# EAGLE board open-lab-VUSB-A (EAGLE 6.5.0)

Size 64.95 x 52.82 mm. Coordinates in mm from the lower left corner, seen from the top.
Outline: 0,0 64.95,0 64.95,52.82 0,52.82 0,0
Copper layers (1*16): Top 0.035mm / dielectric 1.5mm / Bottom 0.035mm
Design rules "default": minimum track width 10mil, minimum drill 24mil, track to track 8mil, track to pad 8mil, pad to pad 8mil, via to via 8mil, smd to smd 8mil, copper to edge 40mil, drill to drill 8mil, minimum pad ring 10mil, minimum via ring 8mil, stop-mask expansion 4mil, vias tented up to drill 0mil, thermal gap 10mil
Net classes: 0 default: width 0.203 mm, clearance 0.203 mm; 1 power: width 0.406 mm, clearance 0.203 mm

## Footprints (pad centres in the part's own frame; a part is rotated, then mirrored left to right if it is on the bottom)
C0805 = smd 1.3 x 1.5: 1 -0.85,0; 2 0.85,0
C0805' = smd 1.3 x 1.5: 1 -0.95,0; 2 0.95,0
CHIPLED_0805 = smd 1.2 x 1.2: A 0,-1.05; C 0,1.05
JST-PH-2-SMT-RA = smd 1 x 4.6: 1 1,-3.7; 2 -1,-3.7 | smd 1.6 x 3.4: NC1 -3.4,1.5; NC2 3.4,1.5
C0805K = smd 1.1 x 1.4: 1 -1,0; 2 1,0
_0805 = smd 1.2 x 1.3: 1 -1.016,0; 2 1.016,0
SOD-323F = smd 1 x 0.8: A -1,0; C 1,0
1X04_LOCK = drill 1.016 pad 1.88 square: 1 0,0.127 | drill 1.016 pad 1.88: 2 2.54,-0.127; 3 5.08,0.127; 4 7.62,-0.127
JP1 = drill 0.914 long: 1 0,-1.27; 2 0,1.27
TQFP32-08 = smd 1.27 x 0.559: 1 -4.293,2.8; 2 -4.293,2; 3 -4.293,1.2; 4 -4.293,0.4; 5 -4.293,-0.4; 6 -4.293,-1.2; 7 -4.293,-2; 8 -4.293,-2.8; 17 4.293,-2.8; 18 4.293,-2; 19 4.293,-1.2; 20 4.293,-0.4; 21 4.293,0.4; 22 4.293,1.2; 23 4.293,2; 24 4.293,2.8 | smd 0.559 x 1.27: 9 -2.8,-4.293; 10 -2,-4.293; 11 -1.2,-4.293; 12 -0.4,-4.293; 13 0.4,-4.293; 14 1.2,-4.293; 15 2,-4.293; 16 2.8,-4.293; 25 2.8,4.293; 26 2,4.293; 27 1.2,4.293; 28 0.4,4.293; 29 -0.4,4.293; 30 -1.2,4.293; 31 -2,4.293; 32 -2.8,4.293
SOT23-5 = smd 0.55 x 1.2: 1 -0.95,-1.3; 2 0,-1.3; 3 0.95,-1.3; 4 0.95,1.3; 5 -0.95,1.3
SOT23 = smd 1 x 1.4: 1 -0.95,-1.1; 2 0.95,-1.1; 3 0,1.1
SO08 = smd 0.66 x 2.032: 1 -1.905,-3.073; 2 -0.635,-3.073; 3 0.635,-3.073; 4 1.905,-3.073; 5 1.905,3.073; 6 0.635,3.073; 7 -0.635,3.073; 8 -1.905,3.073
SOIC28WLONG = smd 0.65 x 1.7: 1 -8.89,-4.78; 2 -7.62,-4.78; 3 -6.35,-4.78; 4 -5.08,-4.78; 5 -3.81,-4.78; 6 -2.54,-4.78; 7 -1.27,-4.78; 8 0,-4.78; 9 1.27,-4.78; 10 2.54,-4.78; 11 3.81,-4.78; 12 5.08,-4.78; 13 6.35,-4.78; 14 7.62,-4.78; 15 7.62,4.78; 16 6.35,4.78; 17 5.08,4.78; 18 3.81,4.78; 19 2.54,4.78; 20 1.27,4.78; 21 0,4.78; 22 -1.27,4.78; 23 -2.54,4.78; 24 -3.81,4.78; 25 -5.08,4.78; 26 -6.35,4.78; 27 -7.62,4.78; 28 -8.89,4.78
2X03 = drill 1.016 octagon: 1 -2.54,-1.27; 2 -2.54,1.27; 3 0,-1.27; 4 0,1.27; 5 2.54,-1.27; 6 2.54,1.27
AYZ0202 = smd 1 x 1.15: 1 -2.5,2.825; 2 0,2.825; 3 2.5,2.825; 4 -2.5,-2.825; 5 0,-2.825; 6 2.5,-2.825 | hole 0.85: 1.5,0; -1.5,0
R0805 = smd 1.3 x 1.5: 1 -0.95,0; 2 0.95,0
MICRO-SD-SOCKET-TAOBAO = smd 0.75 x 1.6: 1 2.25,10.5; 2 1.15,10.5; 3 0.05,10.5; 4 -1.05,10.5; 5 -2.15,10.5; 6 -3.25,10.5; 7 -4.35,10.5; 8 -5.45,10.5 | smd 0.7 x 1.6: CD -6.55,10.5 | smd 1.2 x 1.5: GND1 -7.75,9.8 | smd 1.6 x 1.4: GND3 6.85,10 | smd 1.2 x 2.2: P$1 7.75,0.4; P$2 -7.75,0.4 | hole 1: 3.05,0; -4.93,0
MA08-1 = drill 1.016 long: 1 -8.89,0; 2 -6.35,0; 3 -3.81,0; 4 -1.27,0; 5 1.27,0; 6 3.81,0; 7 6.35,0; 8 8.89,0
R0805@1 = smd 1.3 x 1.5: 1 -0.95,0; 2 0.95,0
HR911105A = drill 0.813 pad 1.524: G+ 4.953,-6.604; G- 4.953,-4.064; GND -8.89,4.445; NC -6.35,3.175; P4 -8.89,-0.635; P5 -6.35,0.635; RD+ -6.35,-1.905; RD- -8.89,1.905; TD- -8.89,-3.175; Y+ 4.953,6.604; Y- 4.953,4.064 | drill 1.651 pad 2.159: SHIELD0 -2.921,8.001; SHIELD1 -2.921,-8.001 | drill 0.813 pad 1.524 square: TD+ -6.35,-4.445 | hole 3.556: 0,-5.715; 0,5.715
EXB38V = smd 0.6 x 0.8: 1 -1.275,-0.75; 4 1.275,-0.75; 5 1.275,0.75; 8 -1.275,0.75 | smd 0.5 x 0.8: 2 -0.4,-0.75; 3 0.4,-0.75; 6 0.4,0.75; 7 -0.4,0.75
R0805' = smd 1.1 x 1.4: 1 -1,0; 2 1,0
1X2-3.5MM = drill 1 pad 2.184: 1 1.8,0; 2 -1.7,0
BMP085 = smd 1.67 x 0.8: P$1 -2.065,1.27; P$2 -2.065,0; P$3 -2.065,-1.27; P$5 2.065,-1.27; P$6 2.065,0; P$7 2.065,1.27 | smd 0.8 x 1.67: P$4 0,-2.065 | smd 0.8 x 2.5: P$8 0,1.65
MA04-1 = drill 1.016 long: 1 -3.81,0; 2 -1.27,0; 3 1.27,0; 4 3.81,0
RESONATOR-SMD = smd 0.7 x 1.7: 1 -1.2,0; 2 0,0; 3 1.2,0
USB-MINIB = smd 2.5 x 0.5: D+ 2.5,0; D- 2.5,0.8; GND 2.5,-1.6; ID 2.5,-0.8; VBUS 2.5,1.6 | smd 2.5 x 2: GND@1 -3,-4.5; GND@2 -3,4.5; GND@3 2.5,4.5; GND@4 2.5,-4.5 | hole 0.9: 0,2.2; 0,-2.2
TC26H = drill 0.813: 1 -1.27,0; 2 1.27,0
HC49U-V = drill 0.813: 1 -2.413,0; 2 2.413,0

## Placement (x,y rotation side)
C1  10u  [C0805]  20.32,15.49 270 top
C2  10u  [C0805]  35.56,8.13 90 top
C3  10u  [C0805]  35.56,2.79 90 top
C4  0.1uF  [C0805']  40.89,28.7 0 top
C5  0.1uF  [C0805']  43.18,17.53 90 top
C11  0.1u  [C0805']  44.45,10.16 90 top
C12  0.1µ  [C0805]  38.35,51.05 180 top
C13  0.1µ  [C0805]  28.7,44.2 270 top
CAP  10u  [C0805]  23.62,45.72 90 top
CHG  0805  [CHIPLED_0805]  44.2,2.54 0 top
CN1  [JST-PH-2-SMT-RA]  51.05,3.81 180 top
CPR  1.0uF  [C0805]  56.13,43.18 180 top
CTC1  10uF  [C0805K]  5.59,18.29 90 top
CTC2  10uF  [C0805K]  1.52,17.78 270 top
CTCP  0.01µF  [_0805]  13.21,18.54 0 top
CX3  18p  [C0805]  47.75,37.85 0 top
CX4  18p  [C0805]  47.24,48.77 0 top
D1  1N4148  [SOD-323F]  17.53,16.76 270 top
D2  1n4148  [SOD-323F]  8.89,18.29 90 top
DHT22  [1X04_LOCK]  13.21,15.49 270 top
ETH  [JP1]  37.59,41.66 0 bottom
FB1  Ferrite  [_0805]  20.83,28.7 0 top
FB2  Ferrite  [_0805]  24.13,22.86 0 top
IC1  ATMEGA328P  [TQFP32-08]  35.05,22.1 225 top
IC2  MCP73831  [SOT23-5]  40.13,2.54 0 top
IC4  MCP1700-33  [SOT23]  40.13,7.37 0 top
IC6  MAX31855  [SO08]  12.45,25.4 180 top
IC7  ENC28J60  [SOIC28WLONG]  37.85,39.62 270 top
ISP  [2X03]  12.7,36.58 180 bottom
J1  AYZ0202  [AYZ0202]  60.45,4.06 180 top
L1  Bead  [R0805]  47.5,40.89 0 top
LCD  [JP1]  61.72,10.41 90 top
MICROSD  USD-SOCKETMICRO-SD-SOCKET-TAOBAO  [MICRO-SD-SOCKET-TAOBAO]  53.85,44.96 180 bottom
N5110  [MA08-1]  60.2,22.86 270 top
Q2  BSS123  [SOT23]  25.15,13.21 0 top
RBS  2.32K  [R0805]  26.67,27.43 0 top
RC  22K  [R0805]  35.05,12.95 0 top
RD+  47  [R0805]  24.64,18.54 0 top
RD-  47  [R0805]  30.23,13.21 90 top
REA1  330  [R0805]  23.88,50.8 180 top
REB1  330  [R0805]  1.78,49.78 270 top
RH  10k  [R0805@1]  17.53,11.68 270 top
RJ45  HR911105A  [HR911105A]  12.19,41.66 90 top
RM3  1.5K  [R0805]  56.13,17.27 90 top
RM4  1.5K  [R0805]  55.12,12.95 180 top
RN1  [EXB38V]  40.39,13.72 90 top
RN3  [EXB38V]  53.59,23.37 270 top
RR+  49.9  [R0805]  26.92,40.39 180 top
RR-  49.9  [R0805]  27.69,36.32 0 top
RRST  10k  [R0805@1]  48.77,13.72 180 top
RSD  10K  [R0805]  53.85,37.85 0 top
RT+  49.9  [R0805]  22.35,33.78 270 top
RT-  49.9  [R0805]  27.18,31.5 0 top
RTC  DS1307  [SO08]  49.28,29.46 270 top
RTCP1  10K  [R0805']  19.56,24.64 0 top
RTCP2  10K  [R0805']  19.56,20.57 90 top
RTHM1  3k  [R0805@1]  9.4,12.95 90 top
RTHM2  3k  [R0805@1]  9.4,7.87 90 top
RU  1.5K  [R0805]  18.29,6.86 0 top
TCPL  1X2-3.5MM  [1X2-3.5MM]  4.06,25.15 270 top
THM1  1X2-3.5MM  [1X2-3.5MM]  3.81,10.67 270 top
THM2  1X2-3.5MM  [1X2-3.5MM]  3.81,3.56 270 top
U3  BMP085  [BMP085]  60.96,39.62 0 top
UART  [MA04-1]  14.99,2.79 180 top
X  12MHz  [RESONATOR-SMD]  43.43,24.64 90 top
X1  USBSMD  [USB-MINIB]  27.18,6.35 90 top
X2  32.768kHz  [TC26H]  48.26,24.38 180 top
X3  25MHz  [HC49U-V]  56.64,49.28 0 top

## Library data of the parts
C1-C3 C12 C13 CAP CX3 CX4 = resistor
C4 C5 C11 L1 RBS RC RD+ RD- REA1 REB1 RH RM3 RM4 RR+ RR- RRST RSD RT+ RT- RTHM1 RTHM2 RU = rcl
CHG = led
CN1 CPR CTC1 CTC2 D1 D2 IC4 IC6 RTC RTCP1 RTCP2 TCPL THM1 THM2 = adafruit
CTCP FB1 FB2 U3 = microbuilder
DHT22 = SparkFun-Connectors
ETH LCD = jumper
IC1 = atmel; MPN: ATMEGA8-16AU; OC_FARNELL: 9171371; OC_NEWARK: 73M8863
IC2 J1 MICROSD X = SparkFunNew
IC7 X1 X3 = SparkFun
ISP = pinhead
N5110 UART = con-lstb; OC_FARNELL: unknown; OC_NEWARK: unknown
Q2 = transistor-small-signal
RJ45 = CONNECTER
RN1 RN3 = resistor-dil; OC_FARNELL: unknown; OC_NEWARK: unknown
X2 = crystal; OC_FARNELL: unknown; OC_NEWARK: unknown

## Nets
A0: IC1.23 RTHM1.2 THM1.1
A1: IC1.24 RTHM2.2 THM2.1
A2: IC1.25 RM3.2 RM4.1
A3: IC1.26 MICROSD.2 RSD.1
AREF: C5.2 IC1.20
CS: D1.A IC6.6 RTCP2.2
D2: IC1.32 N5110.3 RD+.2
D3: IC1.1 N5110.4
D4: IC1.2 N5110.5
D5: IC1.9
D6: D1.C IC1.10
D7: IC1.11 RD-.2
D8: IC1.12 IC7.9
D9: DHT22.2 IC1.13 RH.2
D10: IC1.14
D+: RD+.1 X1.D+
D-: RD-.1 RU.1 X1.D-
GND: C1.2 C2.2 C3.2 C4.1 C5.1 C11.2 C12.1 C13.1 CAP.2 CN1.2 CPR.2 CTC1.2 CTC2.2 CX3.2 CX4.2 DHT22.4 IC1.3 IC1.5 IC1.21 IC2.2 IC4.1 IC6.1 IC7.2 IC7.11 IC7.18 IC7.21 IC7.22 ISP.6 MICROSD.6 MICROSD.GND1 MICROSD.GND3 MICROSD.P$1 MICROSD.P$2 N5110.2 RBS.1 RC.1 RJ45.G- RJ45.GND RJ45.SHIELD0 RJ45.SHIELD1 RJ45.Y- RM3.1 RTC.4 RTHM1.1 RTHM2.1 U3.P$1 UART.1 X1.GND X.2
LEDA: REA1.2 RJ45.G+
LEDB: REB1.2 RJ45.Y+
MISO: IC1.16 IC6.7 IC7.6 ISP.1 MICROSD.7
MOSI: IC1.15 IC7.7 ISP.4 MICROSD.3
N$1: J1.3 J1.6
N$2: IC1.7 X.1
N$3: IC1.8 X.3
N$5: CHG.C IC2.1
N$6: IC2.5 RC.2
N$8: FB1.1 TCPL.2
N$9: CTCP.1 FB1.2 IC6.2
N$10: CHG.A RN1.4
N$11: FB2.1 TCPL.1
N$12: CTCP.2 FB2.2 IC6.3
N$21: RTC.1 X2.2
N$30: RTC.2 X2.1
N$34: IC7.27 REA1.1
N$37: IC7.26 REB1.1
N$39: CAP.1 IC7.1
N$41: CX3.1 IC7.24 X3.2
N$42: CX4.1 IC7.23 X3.1
N$54: C13.2 RR+.2 RR-.1
N$59: IC7.14 RBS.2
RD+: IC7.13 RJ45.RD+ RR+.1
RD-: IC7.12 RJ45.RD- RR-.2
RESET: IC1.29 IC7.10 ISP.5 N5110.1 RRST.1
RXD: IC1.30 UART.3
SCK: D2.C IC1.17 IC7.8 ISP.3 MICROSD.5
SCK1: D2.A IC6.5 RTCP1.2
SCL: IC1.28 RN3.1 RTC.6 U3.P$6
SDA: IC1.27 RN3.2 RTC.5 U3.P$7
TCT: C12.2 L1.1 RJ45.P4 RT+.2 RT-.1
TD+: IC7.17 RJ45.TD+ RT+.1
TD-: IC7.16 RJ45.TD- RT-.2
TXD: IC1.31 UART.4
V_CON: ETH.2 IC7.15 IC7.19 IC7.20 IC7.25 IC7.28 LCD.2 N5110.6 N5110.7 Q2.3 RM4.2
VBAT: CN1.1 IC2.3 J1.2 J1.5
VBUS: C1.1 IC2.4 ISP.2 Q2.1 RN1.5 X1.VBUS
VCC: C3.1 C4.2 C11.1 CPR.1 CTC1.1 CTC2.1 DHT22.1 ETH.1 IC1.4 IC1.6 IC1.18 IC4.2 IC6.4 L1.2 LCD.1 MICROSD.4 Q2.2 RH.1 RN3.7 RN3.8 RRST.2 RSD.2 RTC.3 RTC.8 RTCP1.1 RTCP2.1 RU.2 THM1.2 THM2.2 U3.P$3 U3.P$4 UART.2
VDD: C2.1 IC4.3 J1.1 J1.4

## Tracks (layer width: path | path; a pad name or v marks a point on that pad's centre or on a via)
A0  (2 unrouted)
A1  (2 unrouted)
A2  (2 unrouted)
A3  (2 unrouted)
AREF  (1 unrouted)
CS  (2 unrouted)
D2  (2 unrouted)
D3  (1 unrouted)
D4  (1 unrouted)
D6  (1 unrouted)
D7  (1 unrouted)
D8  (1 unrouted)
D9  (2 unrouted)
D+  (1 unrouted)
D-  (2 unrouted)
GND  (48 unrouted)
LEDA  (1 unrouted)
LEDB  (1 unrouted)
MISO  (4 unrouted)
MOSI  (3 unrouted)
N$1  (1 unrouted)
N$2  (1 unrouted)
N$3  (1 unrouted)
N$5  (1 unrouted)
N$6  (1 unrouted)
N$8  (1 unrouted)
N$9  (2 unrouted)
N$10  (1 unrouted)
N$11  (1 unrouted)
N$12  (2 unrouted)
N$21  (1 unrouted)
N$30  (1 unrouted)
N$34  (1 unrouted)
N$37  (1 unrouted)
N$39  (1 unrouted)
N$41  (2 unrouted)
N$42  (2 unrouted)
N$54  (2 unrouted)
N$59  (1 unrouted)
RD+  (2 unrouted)
RD-  (2 unrouted)
RESET  (4 unrouted)
RXD  (1 unrouted)
SCK  (4 unrouted)
SCK1  (2 unrouted)
SCL  (3 unrouted)
SDA  (3 unrouted)
TCT  (4 unrouted)
TD+  (2 unrouted)
TD-  (2 unrouted)
TXD  (1 unrouted)
V_CON  (10 unrouted)
VBAT  (3 unrouted)
VBUS  (5 unrouted)
VCC  (31 unrouted)
VDD  (3 unrouted)